# Altium PCB CORE_FPGA.PcbDoc (part 2 of 3)
Units mil, origin at the board's own origin, x right, y up, seen from the top; angles counter-clockwise.
Board outline 2362.21 x 2755.91 mil, 6 copper layers (TOP, GND, PWR1, PWR2, 3.3V, BOTTOM), stack 58.111 mil thick; 162 components, 160 nets, 858 pads, 377 vias.
Unrouted connection lines stored in the file: 4.
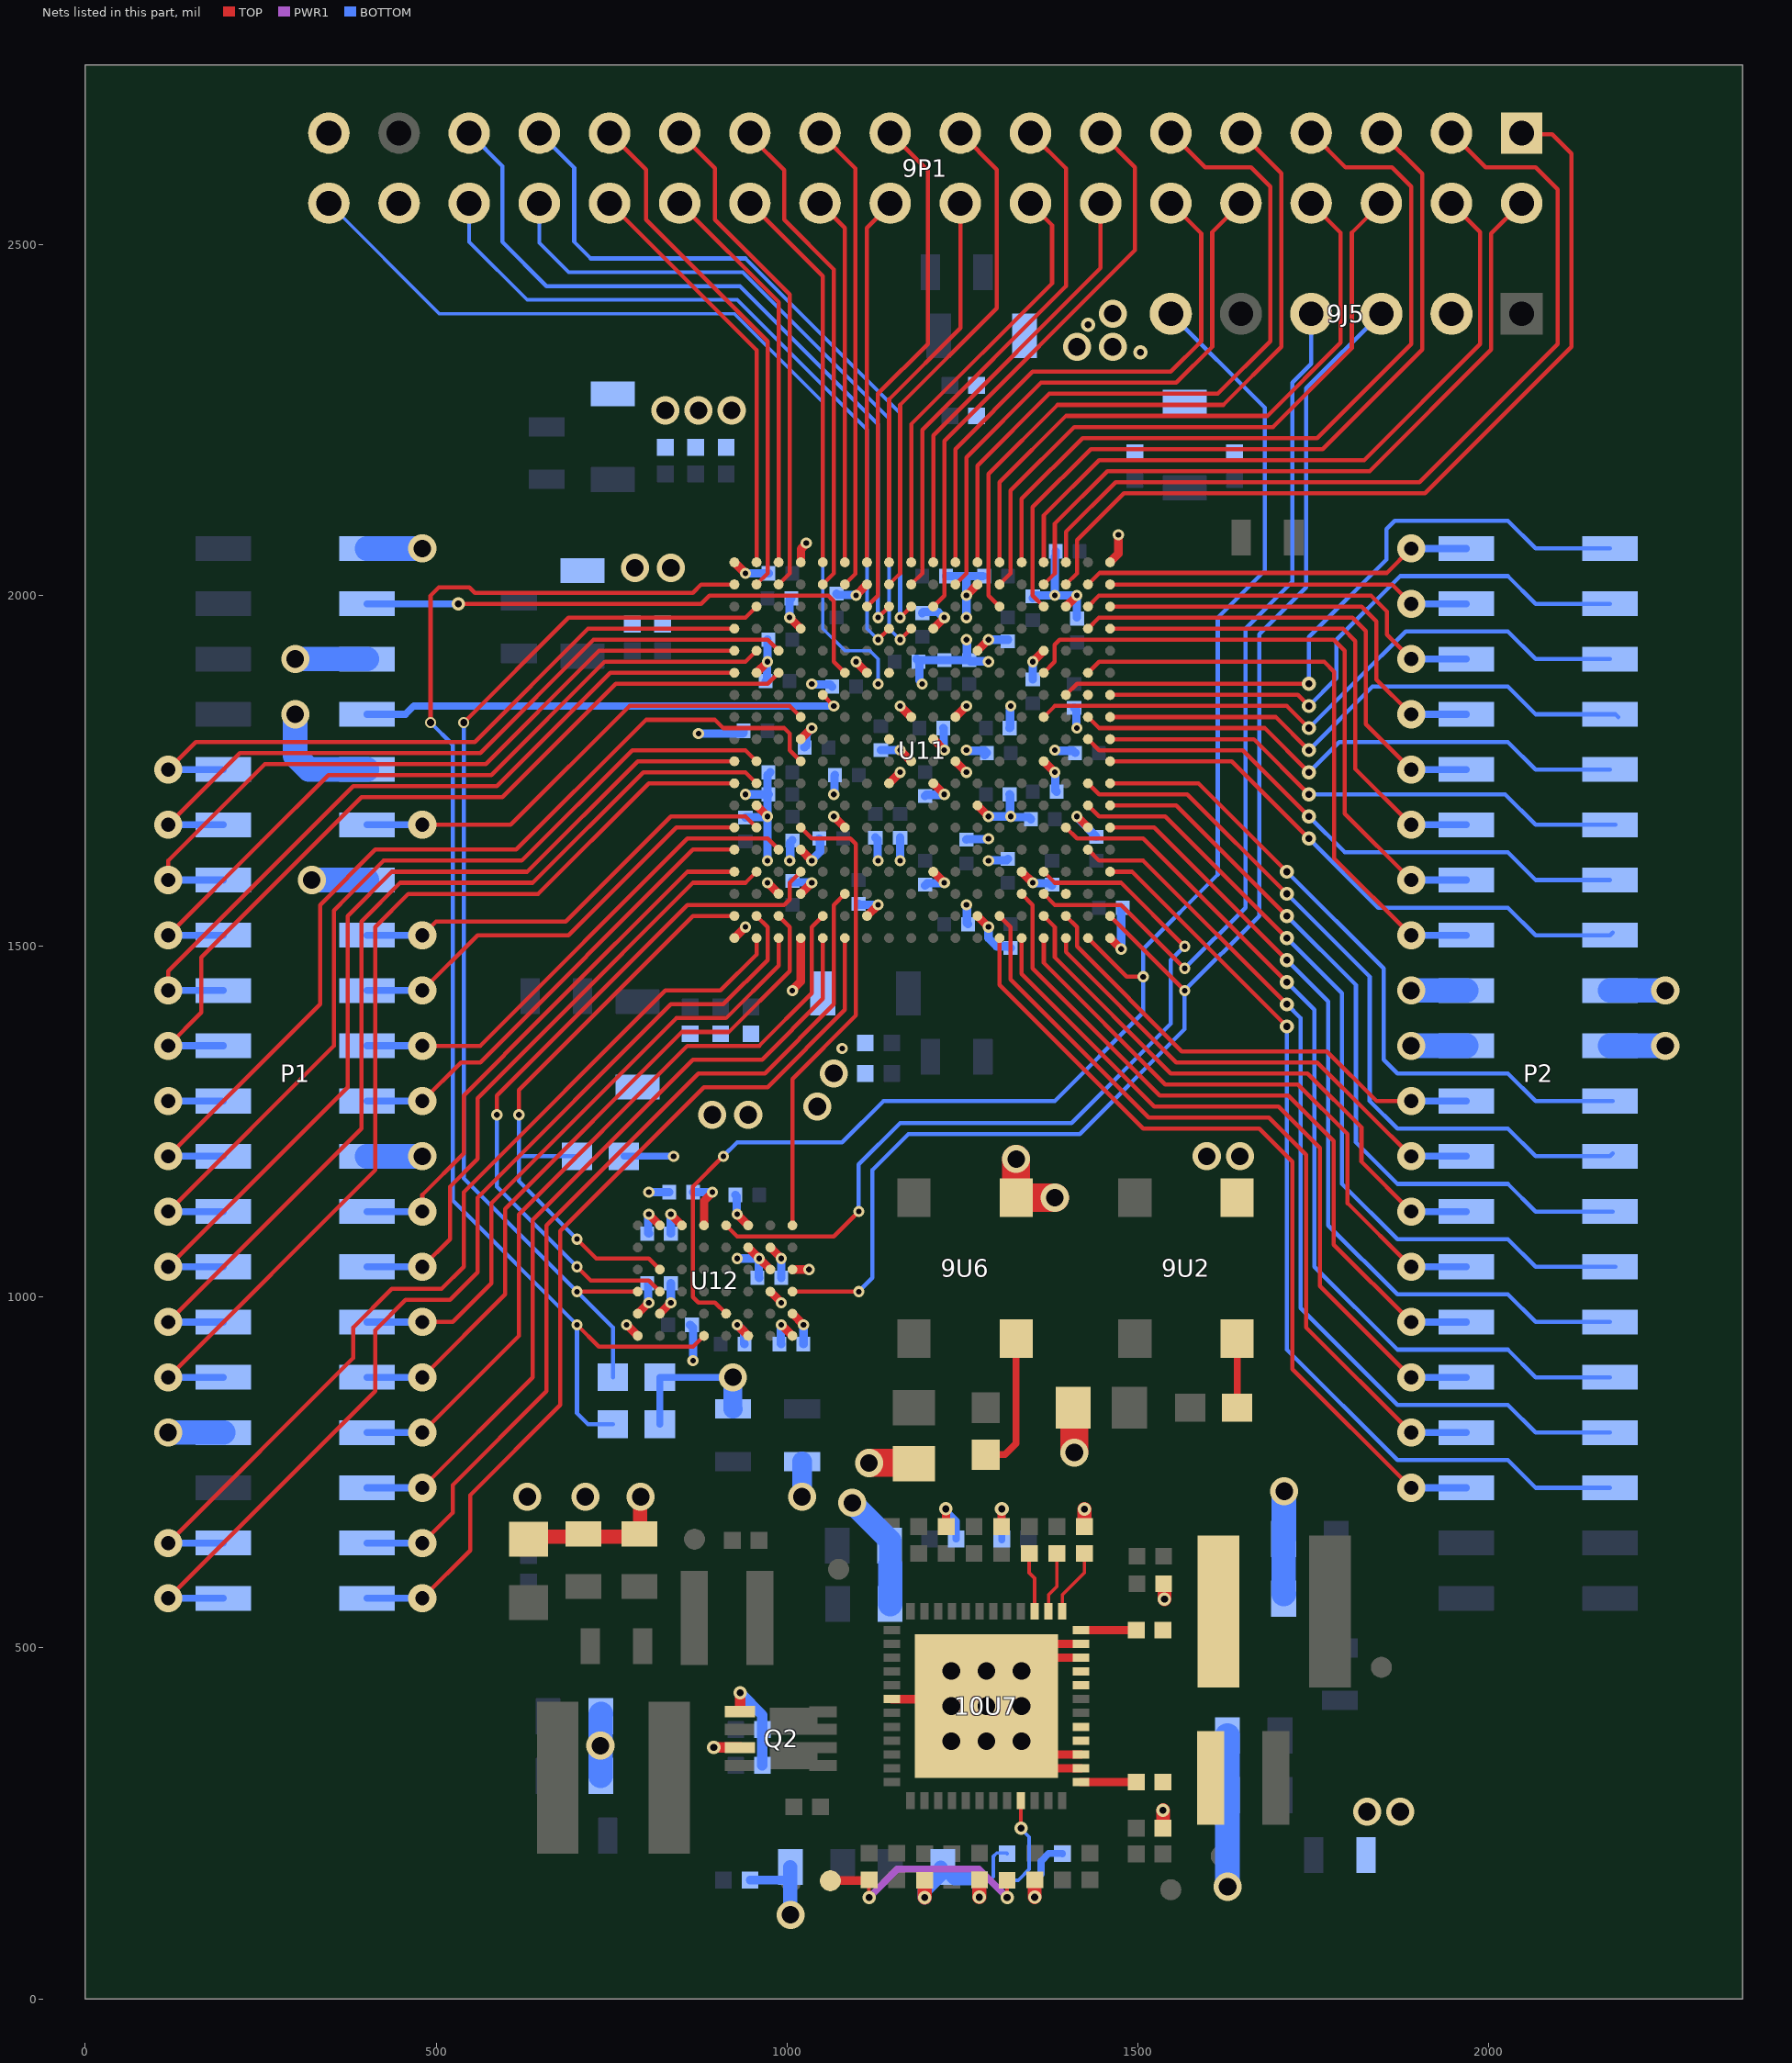
[diagram p6: the nets of this part, all layers, seen from the top]

## Via types
v1: diameter 16, hole 8, TOP to BOTTOM, 150 vias
v2: diameter 40, hole 25, TOP to BOTTOM, 114 vias
v3: diameter 19, hole 10, TOP to BOTTOM, 44 vias
v4: diameter 40, hole 20, TOP to BOTTOM, 44 vias
v5: diameter 20, hole 10, TOP to BOTTOM, 23 vias
v6: diameter 16, hole 10, TOP to BOTTOM, 2 vias

## Nets (pads, with @x,y where several pads share a name; then routed paths per layer and width w, separated by ;. In a path a pad name is that pad's centre, name@x,y a point inside that pad or via, vN(x,y) a via of type N, cw(c..) or ccw(c..) an arc to the next point about the centre after c; other vN are vias at no path point) (continued)
CFPGA_VREG: 10U7.45 C1015.1 R1117.1 R1137.1 TP11.1 | length 500.1
  TOP w5: v3(1117.06,144.65) R1117.1@1117.06,168.95 ; v3(1313.91,144.65) R1137.1@1313.91,168.95 ; v3(1333.59,243.07) 10U7.45@1333.59,282.44
  TOP w12: TP11.1@1061.94,168.27 1062.29,168.62 1116.7,168.62 R1117.1@1117.05,168.97
  PWR1 w10: v3(1117.06,144.65) 1157.45,185.04 1273.52,185.04 1312.89,145.67 v3@1314.96,145.67
  BOTTOM w5: v3(1313.91,144.65) 1313.91,168.95 1329.93,168.95 1345.41,184.43 1345.41,230.84 1333.59,242.65 v3(1333.59,243.07)
CPU_CLK: P1.13 U11.V5 | length 1037.3
  TOP w6: v4(118.11,1594.49) 118.11,1622.05 255.91,1759.84 570.87,1759.84 720.47,1909.45 732.28,1921.26 U11.V5@925.2,1921.26
  BOTTOM w10: v4(118.11,1594.49) P1.13@196.85,1594.49
CPU_CS: P1.15 U11.U5 | length 1085.3
  TOP w6: v4(118.11,1515.75) 251.97,1649.61 346.46,1744.09 578.74,1744.09 740.16,1905.51 870.08,1905.51 940.94,1905.51 U11.U5@956.69,1921.26
  BOTTOM w10: v4(118.11,1515.75) P1.15@196.85,1515.75
CPU_I2S_DI1: 9P1.4 U11.D1 | length 1011.1
  TOP w6: U11.D1@1366.14,2047.24 1366.14,2114.17 1444.88,2192.91 1822.83,2192.91 1988.19,2358.27 1988.19,2518.11 1948.82,2557.48 9P1.4@1948.82,2562.99
CPU_I2S_DI2: 9P1.8 U11.F1 | length 907.7
  TOP w6: U11.F1@1303.15,2047.24 1303.15,2161.42 1397.64,2255.91 1685.04,2255.91 1789.37,2360.24 1789.37,2516.93 9P1.8@1747.24,2559.06 1743.31,2562.99 9P1.8@1740.16,2562.99
CPU_I2S_DI3: 9P1.12 U11.H1 | length 795.8
  TOP w6: U11.H1@1240.16,2047.24 1240.16,2208.66 1350.39,2318.9 1547.24,2318.9 1590.55,2362.2 1590.55,2515.75 9P1.12@1547.24,2559.06 9P1.12@1543.31,2562.99
CPU_I2S_DI4: 9P1.16 U11.K1 | length 602.5
  TOP w6: U11.K1@1177.17,2047.24 1177.17,2244.09 1377.95,2444.88 1377.95,2527.56 9P1.16@1350.39,2555.12
CPU_I2S_DI5: 9P1.20 U11.M1 | length 531.7
  TOP w6: U11.M1@1114.17,2047.24 1114.17,2523.62 1147.24,2556.69 1147.24,2557.48 9P1.20@1141.73,2562.99
CPU_I2S_DI6: 9P1.24 U11.P1 | length 559.8
  TOP w6: 9P1.24@944.88,2562.99 944.88,2561.42 9P1.24@947.24,2559.06 1051.18,2455.12 U11.P1@1051.18,2047.24
CPU_I2S_DI7: 9P1.28 U11.U1 | length 605.7
  TOP w6: 9P1.28@740.16,2559.06 9P1.28@747.24,2559.06 956.69,2349.61 U11.U1@956.69,2047.24
CPU_I2S_DI8: 9P1.32 U11.L4 | length 1058.6
  TOP w6: v1(1129.92,1937.01) U11.L4@1145.67,1952.76
  BOTTOM w5: 9P1.32@543.31,2555.12 547.24,2551.18 547.24,2503.94 629.92,2421.26 929.13,2421.26 1114.17,2236.22 1114.17,1952.76 v1(1129.92,1937.01)
CPU_I2S_DO1: 9P1.2 U11.D2 | length 1044.5
  TOP w6: U11.D2@1366.14,2015.75 1381.89,2031.5 1381.89,2102.36 1456.69,2177.17 1830.71,2177.17 2003.94,2350.39 2003.94,2515.75 9P1.2@2047.24,2559.06
CPU_I2S_DO2: 9P1.6 U11.F2 | length 943.4
  TOP w6: U11.F2@1303.15,2015.75 1318.9,2031.5 1318.9,2149.61 1409.45,2240.16 1692.91,2240.16 1805.12,2352.36 1805.12,2516.93 9P1.6@1847.24,2559.06 1851.18,2562.99 9P1.6@1854.33,2562.99
CPU_I2S_DO3: 9P1.10 U11.H2 | length 829.8
  TOP w6: U11.H2@1240.16,2015.75 1255.91,2031.5 1255.91,2196.85 1362.2,2303.15 1555.12,2303.15 1606.3,2354.33 1606.3,2518.11 9P1.10@1647.24,2559.06 1649.61,2561.42 9P1.10@1649.61,2562.99
CPU_I2S_DO4: 9P1.14 U11.J1 | length 611.3
  TOP w6: U11.J1@1208.66,2047.24 1208.66,2228.35 1447.24,2466.93 1447.24,2557.48 9P1.14@1448.82,2559.06
CPU_I2S_DO5: 9P1.18 U11.L1 | length 558.1
  TOP w6: U11.L1@1145.67,2047.24 1145.67,2279.53 1247.24,2381.1 9P1.18@1247.24,2559.06 1247.24,2562.2 9P1.18@1248.03,2562.99
CPU_I2S_DO6: 9P1.22 U11.N1 | length 526.5
  TOP w6: 9P1.22@1047.24,2559.06 1082.68,2523.62 U11.N1@1082.68,2047.24
CPU_I2S_DO7: 9P1.26 U11.T1 | length 571
  TOP w6: 9P1.26@846.46,2559.06 9P1.26@847.24,2559.06 988.19,2418.11 U11.T1@988.19,2047.24
CPU_I2S_DO8: 9P1.30 U11.K4 | length 1011.4
  TOP w6: v1(1161.42,1937.01) U11.K4@1177.17,1952.76
  BOTTOM w5: 9P1.30@649.61,2566.93 647.24,2564.57 9P1.30@647.24,2559.06 647.24,2502.36 688.98,2460.63 937.01,2460.63 1145.67,2251.97 1145.67,1952.76 v1(1161.42,1937.01)
CPU_I2S_FRM1: 9P1.3 U11.C1 | length 1261.6
  TOP w6: U11.C1@1397.64,2047.24 1397.64,2090.55 1468.5,2161.42 1901.57,2161.42 2098.43,2358.27 2098.43,2578.74 2066.93,2610.24 1996.06,2610.24 1948.82,2657.48 9P1.3@1948.82,2661.42
CPU_I2S_FRM2: 9P1.7 U11.E1 | length 1139.7
  TOP w6: U11.E1@1334.65,2047.24 1334.65,2137.8 1421.26,2224.41 1755.91,2224.41 1889.76,2358.27 1889.76,2582.68 1862.2,2610.24 1796.06,2610.24 9P1.7@1747.24,2659.06 1744.88,2661.42 9P1.7@1744.09,2661.42
CPU_I2S_FRM3: 9P1.11 U11.G1 | length 1029.6
  TOP w6: U11.G1@1271.65,2047.24 1271.65,2185.04 1374.02,2287.4 1614.17,2287.4 1688.98,2362.2 1688.98,2582.68 1661.42,2610.24 1596.06,2610.24 1548.82,2657.48 9P1.11@1539.37,2657.48
CPU_I2S_FRM4: 9P1.15 U11.K2 | length 756.6
  TOP w6: U11.K2@1177.17,2015.75 1192.91,2031.5 1192.91,2236.22 1397.64,2440.94 1397.64,2608.66 1350.39,2655.91 9P1.15@1350.39,2661.42
CPU_I2S_FRM5: 9P1.19 U11.M3 | length 735.9
  TOP w6: U11.M3@1114.17,1984.25 1129.92,2000 1129.92,2287.4 1200.79,2358.27 1200.79,2605.51 9P1.19@1147.24,2659.06 1145.67,2660.63 9P1.19@1145.67,2661.42
CPU_I2S_FRM6: 9P1.23 U11.P2 | length 701.1
  TOP w6: 9P1.23@948.82,2661.42 948.82,2653.54 996.06,2606.3 996.06,2535.43 1066.93,2464.57 1066.93,2031.5 U11.P2@1051.18,2015.75
CPU_I2S_FRM7: 9P1.27 U11.U2 | length 741.7
  TOP w6: 9P1.27@748.03,2657.48 748.82,2657.48 799.21,2607.09 799.21,2535.43 972.44,2362.2 972.44,2031.5 U11.U2@956.69,2015.75
CPU_I2S_FRM8: 9P1.31 U11.L3 | length 1127.5
  TOP w6: v1(1129.92,1968.5) U11.L3@1145.67,1984.25
  BOTTOM w6: 9P1.31@543.31,2669.29 543.31,2662.99 9P1.31@547.24,2659.06 594.49,2611.81 594.49,2503.94 657.48,2440.94 933.07,2440.94 1129.92,2244.09 v1(1129.92,1968.5)
CPU_I2S_MCLK: 9P1.36 U11.L6 | length 1276.3
  BOTTOM w5: 9P1.36@347.24,2559.06 504.72,2401.57 925.2,2401.57 1051.18,2275.59 1051.18,1952.76 1082.68,1921.26 1118.11,1921.26 1129.92,1909.45 v1(1129.92,1874.02)
CPU_I2S_SCLK1: 9P1.1 U11.C2 | length 1251.8
  TOP w6: U11.C2@1397.64,2015.75 1413.39,2031.5 1413.39,2078.74 1480.31,2145.67 1909.45,2145.67 2118.11,2354.33 2118.11,2629.92 2090.55,2657.48 2048.82,2657.48 9P1.1@2047.24,2659.06 2044.88,2661.42 9P1.1@2043.31,2661.42
CPU_I2S_SCLK2: 9P1.5 U11.D3 | length 1129.3
  TOP w6: U11.D3@1366.14,1984.25 1350.39,2000 1350.39,2125.98 1433.07,2208.66 1763.78,2208.66 1905.51,2350.39 1905.51,2600.79 1848.82,2657.48 9P1.5@1846.46,2657.48
CPU_I2S_SCLK3: 9P1.9 U11.F3 | length 1017.8
  TOP w6: U11.F3@1303.15,1984.25 1287.4,2000 1287.4,2173.23 1385.83,2271.65 1622.05,2271.65 1704.72,2354.33 1704.72,2601.57 1649.61,2656.69 9P1.9@1649.61,2661.42
CPU_I2S_SCLK4: 9P1.13 U11.J3 | length 825.3
  TOP w6: U11.J3@1208.66,1984.25 1224.41,2000 1224.41,2220.47 1496.06,2492.13 1496.06,2610.24 9P1.13@1447.24,2659.06 1444.88,2661.42 9P1.13@1444.88,2669.29
CPU_I2S_SCLK5: 9P1.17 U11.L2 | length 732.6
  TOP w6: U11.L2@1145.67,2015.75 1161.42,2031.5 1161.42,2271.65 1299.21,2409.45 1299.21,2607.09 9P1.17@1247.24,2659.06 1244.88,2661.42 9P1.17@1244.09,2661.42
CPU_I2S_SCLK6: 9P1.21 U11.N2 | length 679.3
  TOP w6: 9P1.21@1039.37,2661.42 1044.88,2661.42 9P1.21@1047.24,2659.06 1097.76,2608.54 1097.76,2030.83 U11.N2@1082.68,2015.75
CPU_I2S_SCLK7: 9P1.25 U11.T2 | length 715.8
  TOP w6: 9P1.25@850.39,2661.42 850.39,2655.91 897.64,2608.66 897.64,2535.43 1003.94,2429.13 1003.94,2031.5 U11.T2@988.19,2015.75
CPU_I2S_SCLK8: 9P1.29 U11.K3 | length 1058
  TOP w6: v1(1161.42,1968.5) U11.K3@1177.17,1984.25
  BOTTOM w6: 9P1.29@645.67,2661.42 645.67,2660.63 9P1.29@647.24,2659.06 696.85,2609.45 696.85,2503.94 720.47,2480.32 940.94,2480.32 1161.42,2259.84 v1(1161.42,1968.5)
CPU_MISO: P1.9 U11.V4 | length 969
  TOP w6: v4(118.11,1751.97) 157.48,1791.34 555.12,1791.34 716.54,1952.76 U11.V4@925.2,1952.76
  BOTTOM w10: v4(118.11,1751.97) P1.9@196.85,1751.97
CPU_MOSI: P1.11 U11.T5 | length 1064.6
  TOP w6: v4(118.11,1673.23) 220.47,1775.59 562.99,1775.59 724.41,1937.01 972.44,1937.01 U11.T5@988.19,1921.26
  BOTTOM w10: v4(118.11,1673.23) P1.11@196.85,1673.23
CPU_SCL: P1.17 U11.V6 | length 1089.5
  TOP w6: v4(118.11,1437.01) 118.11,1464.57 381.89,1728.35 586.61,1728.35 748.03,1889.76 U11.V6@925.2,1889.76
  BOTTOM w10: v4(118.11,1437.01) P1.17@196.85,1437.01
CPU_SDA: P1.19 U11.T6 | length 1215.1
  TOP w6: v4(118.11,1358.27) 165.35,1405.51 165.35,1484.25 393.7,1712.6 594.49,1712.6 755.91,1874.02 866.14,1874.02 972.44,1874.02 U11.T6@988.19,1889.76
  BOTTOM w10: v4(118.11,1358.27) P1.19@196.85,1358.27
CPU_TDM_CODEC_INTn: P1.31 U11.V11 | length 1439.4
  TOP w6: v4(118.11,885.83) 413.39,1181.1 413.39,1527.56 460.63,1574.8 645.67,1574.8 795.28,1724.41 803.15,1732.28 U11.V11@925.2,1732.28
  BOTTOM w10: v4(118.11,885.83) P1.31@196.85,885.83
CPU_TDM_SPI_CLK: P1.23 U11.R10 | length 1358.6
  TOP w6: v4(118.11,1200.79) 334.65,1417.32 334.65,1559.06 413.39,1637.8 614.17,1637.8 783.46,1807.09 799.21,1822.83 897.64,1822.83 909.45,1811.02 991.46,1811.02 ; 992.13,1811.02 996.06,1811.02 1003.94,1803.15 1003.94,1779.53 U11.R10@1019.69,1763.78
  BOTTOM w10: v4(118.11,1200.79) P1.23@196.85,1200.79
CPU_TDM_SPI_CS0: P1.29 U11.U11 | length 1421.3
  TOP w6: v4(118.11,964.57) 393.7,1240.16 393.7,1535.43 448.82,1590.55 637.8,1590.55 795.28,1748.03 940.94,1748.03 U11.U11@956.69,1732.28
  BOTTOM w10: v4(118.11,964.57) P1.29@196.85,964.57
CPU_TDM_SPI_MISO: P1.27 U11.V10 | length 1327.2
  TOP w6: v4(118.11,1043.31) 374.02,1299.21 374.02,1543.31 437.01,1606.3 629.92,1606.3 787.4,1763.78 U11.V10@925.2,1763.78
  BOTTOM w10: v4(118.11,1043.31) P1.27@196.85,1043.31
CPU_TDM_SPI_MOSI: P1.25 U11.U10 | length 1309.2
  TOP w6: v4(118.11,1122.05) 354.33,1358.27 354.33,1551.18 374.11,1570.96 425.2,1622.05 622.05,1622.05 779.53,1779.53 940.94,1779.53 U11.U10@956.69,1763.78
  BOTTOM w10: v4(118.11,1122.05) P1.25@196.85,1122.05
f2MHz: P1.12 U11.R8 | length 694.8
  TOP w6: v4(480.31,1673.23) 606.3,1673.23 775.59,1842.52 1003.94,1842.52 U11.R8@1019.69,1826.77
  BOTTOM w10: P1.12@401.57,1673.23 v4(480.31,1673.23)
"FLASH 3.3V": 9C9.2 9C10.2 9C11.2 9C14.2 9C15.2 9L2.2 9R15.2 9R16.2 9R17.2 U12.B2 U12.C6 U12.D6 U12.G5 U12.H2 | length 566.4
  TOP w12: U12.B2@818.9,976.38 v1(834.65,992.13) ; v1(834.65,1118.11) U12.C6@850.39,1102.36 ; U12.D6@881.89,1102.36 881.89,1136.71 893.7,1148.52 v1(893.7,1149.61) ; U12.G5@976.38,1070.87 v1(992.13,1055.12) ; U12.H2@1007.87,976.38 v1(1023.62,960.63)
  BOTTOM w10: 9R15.2@767.72,1200.79 v1(838.58,1200.79) ; 9R16.2@818.9,818.9 9R17.2@818.9,885.83 v2(923.16,885.83)
  BOTTOM w12: v1(834.65,992.13) 9C11.2@834.65,1019.68 ; 9C15.2@834.65,1090.55 v1(834.65,1118.11) ; 9C9.2@866.14,1149.61 v1(893.7,1149.61) ; 9C10.2@992.13,1027.56 v1(992.13,1055.12) ; 9C14.2@1023.62,933.07 v1(1023.62,960.63)
  BOTTOM w27: v2(923.16,885.83) 923.16,840.62 9L2.2@923.23,840.55
FLASH_1.8V: 9L1.2 L223.2 | length 50.2
  BOTTOM w28: v2(1021.65,715.57) 9L1.2@1021.65,765.75
  other v2: 1826.95,266.75 1874.19,266.75
FPGA-CCLK: U11.R15 U12.B3 | length 1003.2
  TOP w6: v1(586.61,1259.84) 586.61,1287.4 858.27,1559.06 996.06,1559.06 1003.94,1566.93 1003.94,1590.55 U11.R15@1019.69,1606.3 ; v1(700.79,1043.31) 720.47,1023.62 803.15,1023.62 U12.B3@818.9,1007.87
  BOTTOM w6: v1(586.61,1259.84) 586.61,1157.48 v1(700.79,1043.31)
FPGA-DIN: U11.R13 U12.H6 | length 669.3
  TOP w6: U12.H6@1007.87,1102.36 1007.87,1311.02 1098.43,1401.57 1098.43,1645.67 1090.55,1653.54 1035.43,1653.54 U11.R13@1019.69,1669.29
FPGA-INIT_B: 9R17.1 U11.U3 U12.A3 | length 1593.8
  TOP w6: v6(539.37,1818.9) 688.98,1968.5 940.94,1968.5 U11.U3@956.69,1984.25 ; v1(700.79,1007.87) 701.04,1008.13 787.15,1008.13 U12.A3@787.4,1007.87
  BOTTOM w6: v6(539.37,1818.9) 539.37,1169.29 v1(700.79,1007.87) 751.97,956.69 9R17.1@751.97,885.83
FPGA_PDN1: P2.35 U11.F18 | length 1202.1
  TOP w6: U11.F18@1303.15,1511.81 1303.15,1444.88 1507.87,1240.16 1673.23,1240.16 1720.47,1192.91 1720.47,897.64 v4(1889.76,728.35)
  BOTTOM w10: v4(1889.76,728.35) P2.35@1968.5,728.35
FPGA_PDN2: P2.33 U11.F17 | length 1158.3
  TOP w6: U11.F17@1303.15,1543.31 1318.9,1527.56 1318.9,1452.76 1515.75,1255.91 1687.01,1255.91 1740.16,1202.76 1740.16,956.69 v4(1889.76,807.09)
  BOTTOM w10: v4(1889.76,807.09) P2.33@1968.5,807.09
FPGA_PDN3: P2.31 U11.E18 | length 1038.4
  TOP w6: U11.E18@1334.65,1511.81 1334.65,1460.63 1523.62,1271.65 1700.79,1271.65 1759.84,1212.6 1759.84,1015.75 v4(1889.76,885.83)
  BOTTOM w10: v4(1889.76,885.83) P2.31@1968.5,885.83
FPGA_PDN4: P2.29 U11.E16 | length 1026.2
  TOP w6: U11.E16@1334.65,1574.8 1350.39,1559.06 1350.39,1468.5 1531.5,1287.4 1714.57,1287.4 1779.53,1222.44 1779.53,1074.8 v4(1889.76,964.57)
  BOTTOM w10: v4(1889.76,964.57) P2.29@1968.5,964.57
FPGA_PDN5: P2.27 U11.D18 | length 874.8
  TOP w6: U11.D18@1366.14,1511.81 1366.14,1476.38 1539.37,1303.15 1728.35,1303.15 1799.21,1232.28 1799.21,1133.86 v4(1889.76,1043.31)
  BOTTOM w10: v4(1889.76,1043.31) P2.27@1968.5,1043.31
FPGA_PDN6: P2.25 U11.D17 | length 831.1
  TOP w6: U11.D17@1366.14,1543.31 1381.89,1527.56 1381.89,1484.25 1547.24,1318.9 1742.13,1318.9 1818.9,1242.13 1818.9,1192.91 v4(1889.76,1122.05)
  BOTTOM w10: v4(1889.76,1122.05) P2.25@1968.5,1122.05
FPGA_PDN7: P2.23 U11.C18 | length 711.2
  TOP w6: U11.C18@1397.64,1511.81 1397.64,1492.13 1555.12,1334.65 1755.91,1334.65 1830.71,1259.84 v4(1889.76,1200.79)
  BOTTOM w10: v4(1889.76,1200.79) P2.23@1968.5,1200.79
FPGA_PDN8: P2.21 U11.C17 | length 696.3
  TOP w6: U11.C17@1397.64,1543.31 1413.39,1527.56 1413.39,1500 1562.99,1350.39 1769.68,1350.39 1840.55,1279.53 v4(1889.76,1279.53)
  BOTTOM w10: v4(1889.76,1279.53) P2.21@1968.5,1279.53
FPGA_PROG_B_2: 9R16.1 U11.V2 U12.D1 | length 1956.1
  TOP w6: v6(492.13,1818.9) 492.13,2000 503.94,2011.81 547.24,2011.81 555.12,2003.94 866.14,2003.94 877.95,2015.75 U11.V2@925.2,2015.75 ; v1(700.79,960.63) 732.03,929.39 866.39,929.39 U12.D1@881.89,944.88
  BOTTOM w6: v6(492.13,1818.9) 523.62,1787.4 523.62,1137.8 v1(700.79,960.63) 700.79,834.65 716.54,818.9 9R16.1@751.97,818.9
FPGA_TCK: 9J5.3 U11.A17 U12.H3 | length 2089.7
  TOP w6: U12.H3@1007.87,1007.87 v1(1102.36,1007.87) ; U11.A17@1460.63,1543.31 v1(1566.93,1437.01)
  BOTTOM w6: v1(1102.36,1007.87) 1122.05,1027.56 1122.05,1181.1 1173.23,1232.28 1417.32,1232.28 1566.93,1381.89 v1(1566.93,1437.01) 1673.23,1543.31 1673.23,1944.88 1740.16,2011.81 1740.16,2295.28 9J5.3@1846.46,2401.57
FPGA_TDI: U11.D15 U12.E6 | length 1168.4
  TOP w6: U12.E6@913.39,1102.36 929.13,1086.61 1066.93,1086.61 v1(1102.36,1122.05) ; U11.D15@1366.14,1606.3 1381.89,1590.55 1476.38,1590.55 v1(1566.93,1500)
  BOTTOM w6: v1(1102.36,1122.05) 1102.36,1188.98 1161.42,1248.03 1405.51,1248.03 1547.24,1389.76 1547.24,1480.31 v1(1566.93,1500)
FPGA_TDO: 9J5.4 U11.D16 | length 1260.8
  TOP w6: U11.D16@1366.14,1574.8 1381.89,1559.06 1476.38,1559.06 1541.34,1494.09 v1(1566.93,1468.5)
  BOTTOM w6: v1(1566.93,1468.5) 1653.54,1555.12 1653.54,1952.76 1720.47,2019.68 1720.47,2303.15 1747.24,2329.92 9J5.4@1747.24,2401.57 1747.24,2408.66 9J5.4@1748.03,2409.45
FPGA_TMS: 9J5.6 U11.B18 U12.E2 | length 2183.8
  TOP w6: v1(909.45,1200.79) 866.14,1157.48 866.14,1000 874.02,992.13 897.64,992.13 U12.E2@913.39,976.38 ; U11.B18@1429.13,1511.81 1484.25,1456.69 v1(1507.87,1456.69)
  BOTTOM w6: v1(909.45,1200.79) 929.13,1220.47 1078.74,1220.47 1137.8,1279.53 1381.89,1279.53 1507.87,1405.51 v1(1507.87,1456.69) 1507.87,1496.06 1614.17,1602.36 1614.17,1968.5 1681.1,2035.43 1681.1,2267.72 9J5.6@1547.24,2401.57
fR0: P2.16 U11.A10 | length 820.9
  TOP w6: U11.A10@1460.63,1763.78 1633.86,1763.78 v5(1744.09,1653.54)
  BOTTOM w6: v5(1744.09,1653.54) 1842.52,1555.12 2027.56,1555.12 2066.93,1515.75 P2.16@2173.23,1515.75 P2.16@2177.17,1519.68
fR1: P2.14 U11.B9 | length 827.3
  TOP w6: U11.B9@1429.13,1795.28 1444.88,1779.53 1649.61,1779.53 v5(1744.09,1685.04)
  BOTTOM w6: v5(1744.09,1685.04) 1795.28,1633.86 2027.56,1633.86 2066.93,1594.49 P2.14@2173.23,1594.49
fR2: P2.12 U11.A9 | length 771
  TOP w6: U11.A9@1460.63,1795.28 1665.35,1795.28 v5(1744.09,1716.54)
  BOTTOM w6: v5(1744.09,1716.54) 2023.62,1716.54 2066.93,1673.23 P2.12@2181.1,1673.23
fR3: P2.10 U11.B8 | length 811
  TOP w6: U11.B8@1429.13,1826.77 1444.88,1811.02 1681.1,1811.02 v5(1744.09,1748.03)
  BOTTOM w6: v5(1744.09,1748.03) 1787.4,1791.34 2027.56,1791.34 2066.93,1751.97 P2.10@2173.23,1751.97
fR4: P2.8 U11.A8 | length 799.4
  TOP w6: U11.A8@1460.63,1826.77 1696.85,1826.77 v5(1744.09,1779.53)
  BOTTOM w6: v5(1744.09,1779.53) 1834.65,1870.08 2027.56,1870.08 2066.93,1830.71 2181.1,1830.71 P2.8@2185.04,1826.77
fR5: P2.6 U11.D8 | length 904
  TOP w6: U11.D8@1366.14,1826.77 1381.89,1842.52 1712.6,1842.52 v5(1744.09,1811.02)
  BOTTOM w6: v5@1740.16,1811.02 v5(1744.09,1811.02) 1811.02,1877.95 1881.89,1948.82 2027.56,1948.82 2066.93,1909.45 P2.6@2173.23,1909.45
fR6: P2.4 U11.A7 | length 844.4
  TOP w6: U11.A7@1460.63,1858.27 1728.35,1858.27 v5(1744.09,1842.52)
  BOTTOM w6: v5(1744.09,1842.52) 1783.46,1881.89 1783.46,1937.01 1874.02,2027.56 2027.56,2027.56 2066.93,1988.19 P2.4@2173.23,1988.19
fR7: P2.2 U11.C7 | length 959.2
  TOP w6: U11.C7@1397.64,1858.27 1413.39,1874.02 v5(1744.09,1874.02)
  BOTTOM w6: v5(1744.09,1874.02) 1744.09,1940.94 1854.33,2051.18 1854.33,2094.49 1866.14,2106.3 2027.56,2106.3 2066.93,2066.93 P2.2@2173.23,2066.93
fRX: P1.8 U11.P7 | length 692.5
  TOP w6: U11.P7@1051.18,1858.27 v1(1066.93,1842.52)
  BOTTOM w10: P1.8@401.57,1830.71 456.69,1830.71 468.5,1842.52 v1(1066.93,1842.52)
fT0: P2.36 U11.A15 | length 1350
  TOP w6: U11.A15@1460.63,1606.3 1492.13,1606.3 v5(1712.6,1385.83)
  BOTTOM w6: v5@1712.6,1389.76 v5(1712.6,1385.83) 1712.6,925.2 1870.08,767.72 2027.56,767.72 2066.93,728.35 P2.36@2173.23,728.35
fT1: P2.34 U11.B14 | length 1330.3
  TOP w6: U11.B14@1429.13,1637.8 1444.88,1622.05 1507.87,1622.05 v5(1712.6,1417.32)
  BOTTOM w6: v5(1712.6,1417.32) 1732.28,1397.64 1732.28,984.25 1870.08,846.46 2027.56,846.46 2066.93,807.09 P2.34@2173.23,807.09
fT2: P2.32 U11.C13 | length 1314.6
  TOP w6: U11.C13@1397.64,1669.29 1413.39,1653.54 1507.87,1653.54 v5(1712.6,1448.82)
  BOTTOM w6: v5(1712.6,1448.82) 1751.97,1409.45 1751.97,1043.31 1870.08,925.2 2027.56,925.2 2066.93,885.83 P2.32@2173.23,885.83
fT3: P2.30 U11.A13 | length 1191.3
  TOP w6: U11.A13@1460.63,1669.29 1523.62,1669.29 v5(1712.6,1480.32)
  BOTTOM w6: v5(1712.6,1480.32) 1771.65,1421.26 1771.65,1102.36 1870.08,1003.94 2027.56,1003.94 2066.93,964.57 P2.30@2173.23,964.57
fT4: P2.28 U11.B12 | length 1183.4
  TOP w6: U11.B12@1429.13,1700.79 1444.88,1685.04 1539.37,1685.04 v5(1712.6,1511.81)
  BOTTOM w6: v5(1712.6,1511.81) 1791.34,1433.07 1791.34,1161.42 1870.08,1082.68 2027.56,1082.68 2066.93,1043.31 P2.28@2173.23,1043.31 P2.28@2181.1,1043.31
fT5: P2.26 U11.A12 | length 1087.7
  TOP w6: U11.A12@1460.63,1700.79 1555.12,1700.79 v5(1712.6,1543.31)
  BOTTOM w6: v5(1712.6,1543.31) 1811.02,1444.88 1811.02,1220.47 1870.08,1161.42 2027.56,1161.42 2066.93,1122.05 P2.26@2173.23,1122.05 P2.26@2177.17,1122.05
fT6: P2.24 U11.B11 | length 1073.6
  TOP w6: U11.B11@1429.13,1732.28 1444.88,1716.54 1570.87,1716.54 v5(1712.6,1574.8)
  BOTTOM w6: v5(1712.6,1574.8) 1830.71,1456.69 1830.71,1279.53 1870.08,1240.16 2027.56,1240.16 2066.93,1200.79 P2.24@2173.23,1200.79 P2.24@2177.17,1204.72
fT7: P2.22 U11.A11 | length 980.2
  TOP w6: U11.A11@1460.63,1732.28 1586.61,1732.28 v5(1712.6,1606.3)
  BOTTOM w6: v5(1712.6,1606.3) 1850.39,1468.5 1850.39,1338.58 1870.08,1318.9 2027.56,1318.9 2066.93,1279.53 P2.22@2177.17,1279.53
fTS0: P2.15 U11.B6 | length 863.1
  TOP w6: U11.B6@1429.13,1889.76 1444.88,1905.51 1765.93,1905.51 1780.2,1891.24 1780.2,1625.31 v4(1889.76,1515.75)
  BOTTOM w10: v4(1889.76,1515.75) P2.15@1968.5,1515.75
fTS1: P2.13 U11.D6 | length 914.1
  TOP w6: U11.D6@1366.14,1889.76 1381.73,1905.35 1381.73,1929.78 1388.96,1937.01 1779.45,1937.01 1795.2,1921.26 1795.2,1689.06 v4(1889.76,1594.49)
  BOTTOM w10: v4(1889.76,1594.49) P2.13@1968.5,1594.49
fTS2: P2.11 U11.A4 | length 730.3
  TOP w6: U11.A4@1460.63,1952.76 1792.68,1952.76 1810.2,1935.24 1810.2,1752.8 1889.2,1673.8 v4@1889.2,1673.24
  BOTTOM w10: v4(1889.76,1673.23) P2.11@1968.5,1673.23
fTS3: P2.9 U11.B4 | length 714.9
  TOP w6: U11.B4@1429.13,1952.76 1444.72,1968.34 1806.1,1968.34 1825.2,1949.24 1825.2,1816.54 v4(1889.76,1751.97) 1890.49,1751.24 v4@1891.2,1751.24
  BOTTOM w10: v4(1889.76,1751.97) P2.9@1968.5,1751.97
fTS4: P2.7 U11.A3 | length 620.5
  TOP w6: U11.A3@1460.63,1984.25 1819.19,1984.25 1840.2,1963.24 1840.2,1880.28 1887.2,1833.28 v4@1887.2,1829.24
  BOTTOM w10: v4(1889.76,1830.71) P2.7@1968.5,1830.71
fTS5: P2.5 U11.B3 | length 603.7
  TOP w6: U11.B3@1429.13,1984.25 1444.72,1999.84 1832.6,1999.84 1855.2,1977.24 1855.2,1944.02 1889.2,1910.02 v4@1889.2,1908.24
  BOTTOM w10: v4(1889.76,1909.45) P2.5@1968.5,1909.45
fTS6: P2.3 U11.A2 | length 519.3
  TOP w6: U11.A2@1460.63,2015.75 1862.2,2015.75 v4(1889.76,1988.19)
  BOTTOM w10: v4(1889.76,1988.19) P2.3@1968.5,1988.19
fTS7: P2.1 U11.B2 | length 560.6
  TOP w6: U11.B2@1429.13,2015.75 1445.54,2032.16 1854.99,2032.16 v4(1889.76,2066.93)
  BOTTOM w10: v4(1889.76,2066.93) P2.1@1968.5,2066.93
fTX: P1.4 U11.N6 | length 782.4
  TOP w6: v3(531.5,1988.19) 877.95,1988.19 889.76,2000 1059.06,2000 1066.93,1992.13 1066.93,1905.51 U11.N6@1082.68,1889.76
  BOTTOM w10: P1.4@401.57,1988.19 v3(531.5,1988.19)
GFPGA_DONE: 9R15.1 U11.V17 U12.B4 | length 879.3
  TOP w6: v1(618.11,1259.84) 618.11,1295.28 866.14,1543.31 U11.V17@925.2,1543.31 ; v1@696.85,1082.68 v1(700.79,1082.68) 728.35,1055.12 803.15,1055.12 U12.B4@818.9,1039.37
  BOTTOM w6: v1(618.11,1259.84) 618.11,1200.79 ; v1(700.79,1082.68) 618.11,1165.35 618.11,1200.79 ; 9R15.1@700.79,1200.79 618.11,1200.79
GND: 9C2.1 9C7.1 9C8.1 9C9.1 9C10.1 9C11.1 9C12.1 9C13.1 9C14.1 9C15.1 9J5.2 9P1.34 9P1.35 9U2.2 9U6.2 10C1.2 10C2.1 10C3.1 10C4.1 10C5.1 10C6.1 10C7.1 10C8.1 10C9.1 10C10.2 10C11.1 10C12.1 10C13.1 10C14.1 10C15.1 10C16.1 10C17.1 10C18.1 10C19.2 10C20.1 10C21.1 10C22.1 10C23.1 10C24.1 10C25.1 10C26.1 10C27.1 10C28.2 10C29.1 10C30.1 10C31.1 10C32.1 10C33.1 10C34.1 10C35.1 10C36.1 10C37.2 10C38.1 10C39.1 10C40.1 10C41.1 10C42.1 10C43.1 10C44.1 10C45.1 10C46.1 10C47.1 10C48.1 10C49.1 10C50.1 10C51.1 10C52.1 10C53.2 10C54.1 10C55.1 10C56.1 10C57.1 10C58.1 10C59.1 10C60.1 10C61.1 10C62.1 10C63.1 10C64.1 10C65.1 10C66.1 10C67.1 10U7.2 10U7.3 10U7.10 10U7.11 10U7.30 10U7.49 C1006.2 C1007.1 C1008.2 C1009.1 C1010.1 C1011.2 C1012.2 C1013.1 C1014.2 C1015.2 C1017.1 C1018.1 C1020.1 C1021.1 C1023.1 C1024.1 C1026.1 C1027.1 LED5.1 P1.2 P1.6 P1.10 P1.14 P1.21 P1.24 P1.33 P2.17 P2.18 P2.19 P2.20 Q2.S1 Q2.S2 R1123.1 R1127.1 R1128.2 R1129.1 R1131.2 R1133.1 R1135.1 R1136.2 R1144.2 R11118.1 U11.A1 U11.A18 U11.B7 U11.B13 U11.C3 U11.C16 U11.D5 U11.D10 U11.E15 U11.G2 U11.G5 U11.G12 U11.G17 U11.H8 U11.H10 U11.J4 U11.J9 U11.J11 U11.J15 U11.K8 U11.K10 U11.L9 U11.L11 U11.M2 U11.M6 U11.M17 U11.N13 U11.R1 U11.R4 U11.R9 U11.R14 U11.R16 U11.R18 U11.T16 U11.U6 U11.U12 U11.V1 U11.V18 U12.A1 U12.A2 U12.B6 U12.F1 U12.F5 U12.F6 U12.G3 U12.G4 U12.H1 U12.H4 | length 6376
  TOP w12: v1(771.65,960.63) U12.A1@787.4,944.88 ; U12.A2@787.4,976.38 v1(803.15,992.13) ; v1(803.15,1118.11) U12.B6@818.9,1102.36 ; U11.V18@925.2,1511.81 v1(940.94,1527.56) ; U11.V1@925.2,2047.24 v1(940.94,2031.5) ; v1(929.13,960.63) U12.F1@944.88,944.88 ; v1(929.13,1055.12) v1@930.22,1055.12 ; v1(929.13,1118.11) U12.F6@944.88,1102.36 ; U12.F5@944.88,1070.87 v1(960.63,1055.12) U12.G4@976.38,1039.37 ; U11.U12@956.69,1700.79 v1(972.44,1685.04) ; U11.U6@956.69,1889.76 v1(972.44,1905.51) ; v1(972.44,1590.55) U11.T16@988.19,1574.8 ; U12.G3@976.38,1007.87 v1(992.13,992.13) ; v1(992.13,960.63) U12.H1@1007.87,944.88 ; v1(1003.94,1968.5) U11.R4@1019.69,1952.76 ; U12.H4@1007.87,1039.37 v1(1031.5,1039.37) ; v1(1007.87,1437.01) 1007.87,1438.09 1019.69,1449.9 U11.R18@1019.69,1511.81 ; U11.R16@1019.69,1574.8 v1(1035.43,1590.55) ; U11.R14@1019.69,1637.8 v1(1035.43,1622.05) ; U11.R9@1019.69,1795.28 v1(1035.43,1811.02) ; U11.R1@1019.69,2047.24 1020.1,2047.66 1020.1,2066.26 1027.56,2073.72 v1(1027.56,2074.8) ; v1(1066.93,1685.04) U11.N13@1082.68,1669.29 ; v1(1098.43,1905.51) U11.M6@1114.17,1889.76 ; v1(1098.43,2000) U11.M2@1114.17,2015.75 ; U11.M17@1114.17,1543.31 v1(1129.92,1559.06) ; U11.L11@1145.67,1732.28 v1(1161.42,1748.03) ; 10U7.30@1149.54,427.13 10U7.49@1190.88,427.13 ; v1(1161.42,1779.53) U11.K10@1177.17,1763.78 ; v1(1161.42,1842.52) U11.K8@1177.17,1826.77 ; U11.J15@1208.66,1606.3 v1(1224.41,1590.55) ; U11.J11@1208.66,1732.28 v1(1224.41,1716.54) ; U11.J9@1208.66,1795.28 v1(1224.41,1779.53) ; U11.J4@1208.66,1952.76 v1(1224.41,1968.5) ; v3(1226.31,698.25) 1226.8,697.76 1226.8,671.76 R1131.2@1227.31,671.25 ; U11.H10@1240.16,1763.78 v1(1255.91,1748.03) ; U11.H8@1240.16,1826.77 v1(1255.91,1842.52) ; v1(1255.91,2000) U11.G2@1271.65,2015.75 ; U11.G17@1271.65,1543.31 v1(1287.4,1527.56) ; U11.G12@1271.65,1700.79 v1(1287.4,1685.04) ; U11.G5@1271.65,1921.26 v1(1287.4,1937.01) ; v5@1305.31,698.25 1306.17,697.39 1306.17,672.94 R11118.1@1306.03,672.8 ; U11.E15@1334.65,1606.3 v1(1350.39,1590.55) ; v1(1350.39,1905.51) U11.D5@1366.14,1921.26 ; U11.D10@1366.14,1763.78 v1(1381.89,1748.03) ; 10U7.49@1371.98,328.7 10U7.2@1419.22,328.7 ; 10U7.49@1371.98,348.39 10U7.3@1419.22,348.39 ; 10U7.49@1371.98,486.18 10U7.10@1419.22,486.18 ; 10U7.49@1371.98,505.87 10U7.11@1419.22,505.87 ; U11.C3@1397.64,1984.25 v1(1413.39,2000) ; v1(1413.39,1685.04) U11.B13@1429.13,1669.29 ; U11.A18@1460.63,1511.81 v1(1476.38,1496.06) ; U11.A1@1460.63,2047.24 1460.63,2047.83 1472.44,2059.64 v1(1472.44,2086.61)
  TOP w15: v3(895.8,358.15) Q2.S2@933.28,358.15 ; Q2.S1@933.28,409.33 v3(933.24,436.04)
  TOP w20: LED5.1@623.93,662.27 627.44,658.76 785.94,658.76 C1020.1@789.78,662.6 790.64,663.47 790.64,707.98 v2@790.93,708.27 ; v3(1196.47,144.48) R1127.1@1196.47,168.97 ; v3(1274.17,144.78) 1274.17,169.27 R1136.2@1274.54,169.64 ; v3(1353.17,144.78) 1353.17,169.53 R1144.2@1353.28,169.64 ; R1123.1@1424.15,672.8 v3(1424.17,697.78) ; R1133.1@1535.96,243.07 1536.17,243.27 v3(1536.17,268.78) ; R1135.1@1536.95,591.5 1538.17,590.28 v3(1538.17,569.78)
  TOP w40: v2@1118.11,763.78 9C12.1@1179.84,763.78 ; 9U6.2@1326.77,1142.99 v2(1326.77,1196.85) ; 9U6.2@1328.03,1141.73 v2(1381.89,1141.73) ; 9C2.1@1408.19,842.52 1409.45,841.26 v2@1409.45,779.53
  BOTTOM w5: C1014.2@1274.54,169.64 1274.68,169.78 1290.17,169.78 1294.17,173.78 1294.17,202.78 1299.17,207.78 1313.08,207.78 C1015.2@1313.9,206.97
  BOTTOM w10: v4(118.11,1279.53) P1.21@196.85,1279.53 ; C1006.2@1005.27,169.29 C1006.2@1008.31,166.25 ; v3(1226.31,698.25) 1226.31,695.82 1241.31,680.82 C1009.1@1241.31,655.25 ; C1013.1@1306.31,654.25 C1013.1@1306.31,655.25 v5(1306.31,698.25) ; v3(1353.17,144.78) 1353.17,168.57 1362.31,177.71 1362.31,196.25 1373.31,207.25 1392.36,207.25 C1010.1@1392.65,206.97
  BOTTOM w12: v1(803.15,992.13) 802.38,992.89 802.38,1018.92 9C11.1@803.15,1019.68 ; 9C15.1@803.15,1090.55 802.38,1091.32 802.38,1117.34 v1(803.15,1118.11) ; v1(803.15,1149.61) 9C9.1@832.14,1149.61 ; 9C7.1@862.2,960.63 866.14,956.69 v1(866.14,909.45) ; v1(874.02,1803.15) 937.01,1803.15 938.44,1804.58 10C24.1@938.44,1807.09 ; 9C13.1@926.63,1145.67 928.37,1143.93 928.37,1118.88 v1(929.13,1118.11) ; v1(929.13,960.63) 938.98,950.79 938.98,933.61 9C8.1@939.51,933.07 ; v1(929.13,1055.12) v1(960.63,1055.12) 959.86,1054.35 959.86,1028.32 9C10.1@960.63,1027.56 ; 10C23.1@940.94,1683.61 941.66,1684.32 971.72,1684.32 v1(972.44,1685.04) ; v1(940.94,1716.54) 10C41.1@972.44,1716.54 ; v1(940.94,2031.5) 10C34.1@973.87,2031.5 ; C1007.1@947.45,169.29 C1006.2@1003.94,169.29 ; 10C25.1@969.94,1877.95 971.68,1879.69 971.68,1904.75 v1(972.44,1905.51) 10C42.1@972.44,1937.01 ; v1(972.44,1622.05) v1(972.44,1685.04) ; 10C41.1@973.87,1716.54 10C41.1@972.44,1716.54 ; 10C40.1@976.38,1748.03 972.44,1744.09 10C41.1@972.44,1716.54 ; 9C14.1@992.13,933.07 991.36,933.84 991.36,959.86 v1(992.13,960.63) ; v1(1003.94,1622.05) 1004.7,1622.81 1004.7,1647.87 10C26.1@1007.87,1651.04 ; v1@1003.94,1972.44 1003.94,1993.56 10C22.1@1006.44,1996.06 ; 10C13.1@1007.87,1593.06 1009.61,1591.32 1034.67,1591.32 v1(1035.43,1590.55) ; 10C27.1@1025.06,1783.46 1027.56,1785.97 1027.56,1802.07 1035.43,1809.94 v1(1035.43,1811.02) ; v1(1035.43,1622.05) 1035.43,1623.13 1047.24,1634.94 1047.24,1652.29 10C48.1@1045.99,1653.54 ; v1(1035.43,1874.02) 1036.2,1873.25 1061.25,1873.25 10C59.1@1064.43,1870.08 ; v1(1066.93,1685.04) v1@1066.93,1686.12 ; v1(1066.93,1716.54) 1067.65,1717.25 1067.65,1743.38 10C58.1@1068.36,1744.09 ; 10C36.1@1070.87,2002.5 1072.6,2000.77 1097.66,2000.77 v1(1098.43,2000) ; 10C17.1@1102.36,1560.49 1103.8,1559.06 v1(1129.92,1559.06) ; 10C67.1@1125.98,1654.98 1129.16,1651.8 1129.16,1622.81 v1(1129.92,1622.05) ; 10C66.1@1133.86,1779.53 v1(1161.42,1779.53) ; v1(1161.42,1622.05) 10C64.1@1161.42,1654.98 ; 10C43.1@1185.04,1909.45 1186.47,1908.02 10C57.1@1224.41,1908.02 10C63.1@1259.84,1908.02 ; 10C43.1@1187.54,1905.51 1188.98,1904.08 1188.98,1879.04 1192.91,1875.1 v1(1192.91,1874.02) ; 10C32.1@1192.91,1974.94 1194.35,1976.38 1215.45,1976.38 1223.33,1968.5 v1(1224.41,1968.5) ; 10C14.1@1196.85,1586.61 1200.02,1589.79 1223.64,1589.79 v1(1224.41,1590.55) ; 10C65.1@1196.85,1714.03 1198.59,1715.77 1223.64,1715.77 v1(1224.41,1716.54) ; 10C60.1@1222.98,1811.02 1223.69,1810.31 1223.69,1780.24 v1(1224.41,1779.53) ; 10C31.1@1226.91,2027.56 1255.91,2027.56 ; v1(1255.91,1559.06) 1256.67,1558.29 1256.67,1533.23 10C16.1@1258.41,1531.5 ; 10C52.1@1255.91,1652.11 1256.62,1652.83 1286.68,1652.83 v1(1287.4,1653.54) v1@1286.64,1654.31 ; v1(1255.91,1779.53) 1256.67,1778.76 1281.73,1778.76 10C45.1@1284.9,1775.59 10C45.1@1281.73,1772.42 ; v1(1255.91,1937.01) 1256.67,1936.24 1256.67,1911.19 10C63.1@1259.84,1908.02 ; v1(1255.91,1968.5) v1(1255.91,2000) ; v1@1255.91,2003.94 1255.91,2027.56 ; 10C35.1@1279.53,2027.56 1255.91,2027.56 ; v1(1287.4,1527.56) 1287.4,1511.81 1299.21,1500 1316.39,1500 10C15.1@1318.9,1497.5 ; v1(1287.4,1622.05) 1288.17,1622.81 1313.22,1622.81 10C18.1@1314.96,1624.55 ; v1(1287.4,1685.04) v1(1318.9,1685.04) ; v1(1287.4,1905.51) 1286.64,1906.28 1261.58,1906.28 10C63.1@1259.84,1908.02 ; v1(1287.4,1937.01) 10C33.1@1314.96,1937.01 ; 10C61.1@1317.46,1716.54 1318.18,1715.82 1318.18,1685.76 v1(1318.9,1685.04) ; 10C56.1@1317.46,1811.02 1318.18,1811.74 1318.18,1841.8 v1(1318.9,1842.52) ; 10C5.1@1347.89,1681.1 1344.72,1684.27 1319.66,1684.27 v1(1318.9,1685.04) ; v1(1350.39,1590.55) 1351.16,1589.79 1374.78,1589.79 10C51.1@1377.95,1586.61 ; 10C49.1@1350.39,1880.46 v1(1350.39,1905.51) ; 10C44.1@1350.39,1996.06 1354.33,2000 v1(1381.89,2000) ; v1(1381.89,1748.03) 1382.66,1747.27 1382.66,1722.21 10C7.1@1384.39,1720.47 ; v1(1381.89,1779.53) 1382.66,1778.76 1407.71,1778.76 10C4.1@1410.88,1775.59 ; 10C50.1@1383.32,2062.99 1383.32,2056.55 1381.89,2055.12 v1(1381.89,2000) ; 10C6.1@1409.45,1840.02 1412.62,1836.84 1412.62,1811.79 v1(1413.39,1811.02) ; v1(1413.39,1685.04) 1413.39,1683.96 1431.1,1666.24 1431.1,1665.89 10C9.1@1440.94,1656.05 ; 10C8.1@1413.39,1968.5 v1(1413.39,2000) v1(1381.89,2000) ; v1(1476.38,1496.06) 10C47.1@1476.38,1555.12 ; v1(972.44,1685.04) 10C41.1@972.44,1716.54
  BOTTOM w15: v3(933.24,436.04) 965.1,404.19 R1129.1@965.1,383.82 R1128.2@965.1,332.64
  BOTTOM w20: v2@1004.78,118.78 C1006.2@1004.78,187.8 ; v3(1196.47,144.48) 1196.47,154.22 1219.17,176.91 C1011.2@1219.17,186.78 ; C1011.2@1231.17,179.78 1239.31,171.64 1272.54,171.64 C1014.2@1274.54,169.64
  BOTTOM w32: v2(1093.17,706.78) 1093.31,706.78 1147.18,652.92 1147.18,618.78
  BOTTOM w35: v2(118.11,807.09) P1.33@196.85,807.09 ; v2(299.21,1830.71) 299.21,1771.65 318.68,1752.19 401.36,1752.19 P1.10@401.57,1751.97 ; v2(299.21,1909.45) P1.6@401.57,1909.45 ; v2(322.83,1594.49) P1.14@401.57,1594.49 ; P1.24@401.57,1200.79 v2(480.31,1200.79) ; P1.2@401.57,2066.93 v2(480.31,2066.93) ; C1018.1@734.58,317.8 C1017.1@734.58,402.8 734.58,405.2 C1017.1@735.17,405.78 ; C1012.2@1147.18,562.8 1147.18,618.78 ; v2@1627.99,159.96 C1023.1@1627.99,290.36 C1024.1@1627.99,375.36 ; C1027.1@1708.21,577.05 1707.99,577.27 C1026.1@1707.99,655.36 1708.21,655.58 1708.21,722.82 v2(1708.83,723.44) ; v2(1889.76,1358.27) P2.19@1968.5,1358.27 ; v2(1889.76,1437.01) P2.17@1968.5,1437.01 ; P2.20@2173.23,1358.27 v2(2251.97,1358.27) ; P2.18@2173.23,1437.01 v2(2251.97,1437.01)
  other v1: 1078.74,1354.33
  other v2: 1005.17,119.78 1628.17,159.78 734.17,360.78 1234.38,367.29 1284.38,367.29 1334.38,367.29 1234.38,417.29 1284.38,417.29 1334.38,417.29 1234.38,467.29 1284.38,467.29 1334.38,467.29 630.09,715.57 712.77,715.57 791.51,715.57 1117.14,763.61 1409.62,778.56 1598.43,1200.79 1645.67,1200.79 893.7,1259.84 944.88,1259.84 1043.31,1271.65 1066.93,1318.9 783.46,2039.37 834.65,2039.37 826.77,2263.78 874.02,2263.78 921.26,2263.78 1413.39,2354.33 1464.57,2354.33 1464.57,2401.57
  other v5: 1503.94,2346.46 1429.13,2385.83
LED_FXS_01: P1.40 U11.N18 | length 1322.2
  TOP w6: v4(480.31,570.87) 548.53,639.08 548.53,717.82 677.17,846.46 677.17,1094.49 881.89,1299.21 972.44,1299.21 1082.68,1409.45 U11.N18@1082.68,1511.81
  BOTTOM w10: P1.40@401.57,570.87 v4(480.31,570.87)
LED_FXS_02: P1.38 U11.N16 | length 1308.8
  TOP w6: v4(480.31,649.61) 523.62,692.91 523.62,732.28 657.48,866.14 657.48,1102.36 874.02,1318.9 968.5,1318.9 1066.93,1417.32 1066.93,1559.06 U11.N16@1082.68,1574.8
  BOTTOM w10: P1.38@401.57,649.61 v4(480.31,649.61)
LED_FXS_03: P1.36 U11.P18 | length 1156.3
  TOP w6: v4(480.31,728.35) 637.8,885.83 637.8,1110.24 866.14,1338.58 964.57,1338.58 1051.18,1425.2 U11.P18@1051.18,1511.81
  BOTTOM w10: P1.36@401.57,728.35 v4(480.31,728.35)
LED_FXS_04: P1.34 U11.P17 | length 1111.4
  TOP w6: v4(480.31,807.09) 618.11,944.88 618.11,1118.11 858.27,1358.27 960.63,1358.27 1035.43,1433.07 1035.43,1527.56 U11.P17@1051.18,1543.31
  BOTTOM w10: P1.34@401.57,807.09 v4(480.31,807.09)
LED_FXS_05: P1.32 U11.T17 | length 998.8
  TOP w6: v4(480.31,885.83) 598.43,1003.94 598.43,1125.98 850.39,1377.95 917.32,1377.95 1003.94,1464.57 1003.94,1527.56 U11.T17@988.19,1543.31
  BOTTOM w10: P1.32@401.57,885.83 v4(480.31,885.83)
LED_FXS_06: P1.30 U11.T18 | length 903.2
  TOP w6: v4(480.31,964.57) 523.62,964.57 578.74,1019.68 578.74,1133.86 842.52,1397.64 913.39,1397.64 988.19,1472.44 U11.T18@988.19,1511.81
  BOTTOM w10: P1.30@401.57,964.57 v4(480.31,964.57)
LED_FXS_07: P1.39 U11.U17 | length 1492.3
  TOP w6: v4(118.11,570.87) 413.39,866.14 413.39,952.76 456.69,996.06 519.69,996.06 559.06,1035.43 559.06,1141.73 834.65,1417.32 909.45,1417.32 972.44,1480.32 972.44,1527.56 U11.U17@956.69,1543.31
  BOTTOM w10: v4(118.11,570.87) P1.39@196.85,570.87
LED_FXS_08: P1.37 U11.U18 | length 1375.9
  TOP w6: v4(118.11,649.61) 381.89,913.39 381.89,956.69 437.01,1011.81 507.87,1011.81 539.37,1043.31 539.37,1149.61 826.77,1437.01 905.51,1437.01 956.69,1488.19 U11.U18@956.69,1511.81
  BOTTOM w10: v4(118.11,649.61) P1.37@196.85,649.61
LED_LINK1_WAN1_IN: P1.16 U11.U13 | length 631.8
  TOP w6: v4(480.31,1515.75) 500,1535.43 685.04,1535.43 834.65,1685.04 940.94,1685.04 U11.U13@956.69,1669.29
  BOTTOM w10: P1.16@401.57,1515.75 v4(480.31,1515.75)
LED_LINK1_WAN2_IN: P1.20 U11.T14 | length 715.4
  TOP w6: v4(480.31,1358.27) 562.99,1358.27 858.27,1653.54 972.44,1653.54 U11.T14@988.19,1637.8
  BOTTOM w10: P1.20@401.57,1358.27 v4(480.31,1358.27)
LED_LINK2_WAN1_IN: P1.18 U11.V13 | length 619.8
  TOP w6: v4(480.31,1437.01) 559.05,1515.75 688.98,1515.75 842.52,1669.29 U11.V13@925.2,1669.29
  BOTTOM w10: P1.18@401.57,1437.01 v4(480.31,1437.01)
LED_LINK2_WAN2_IN: P1.22 U11.V14 | length 672
  TOP w6: v4(480.31,1279.53) 535.43,1334.65 562.99,1334.65 866.14,1637.8 U11.V14@925.2,1637.8
  BOTTOM w10: P1.22@401.57,1279.53 v4(480.31,1279.53)
LED_LINK_WAN1_OUT: P1.26 U11.V15 | length 786.5
  TOP w6: v4(480.31,1122.05) 480.31,1145.67 539.37,1204.72 539.37,1287.4 655.51,1403.54 858.27,1606.3 U11.V15@925.2,1606.3
  BOTTOM w10: P1.26@401.57,1122.05 v4(480.31,1122.05)
LED_LINK_WAN2_OUT: P1.28 U11.U15 | length 882.9
  TOP w6: v4(480.31,1043.31) 519.69,1082.68 519.69,1157.48 559.06,1196.85 559.06,1283.46 666.51,1390.92 866.14,1590.55 940.94,1590.55 U11.U15@956.69,1606.3
  BOTTOM w10: P1.28@401.57,1043.31 v4(480.31,1043.31)
Net9R18_2: 9R18.2 9U2.1 | length 100.1
  TOP w10: 9R18.2@1637.8,842.52 1641.73,846.46 9U2.1@1641.73,940.94
Net9R19_2: 9R19.2 9U6.1 | length 199.4
  TOP w10: 9R19.2@1283.46,775.59 1311.02,775.59 1326.77,791.34 9U6.1@1326.77,940.94
Net10U7_1: 10U7.1 C1022.1 | length 78.7
  TOP w12: 10U7.1@1419.22,309.02 C1022.1@1497.96,309.02
Net10U7_4: 10U7.4 10U7.5 C1022.2 L222.1
Net10U7_8: 10U7.8 10U7.9 C1025.2 L224.1
Net10U7_12: 10U7.12 C1025.1 | length 78.7
  TOP w12: 10U7.12@1419.22,525.55 C1025.1@1497.96,525.55
Net10U7_13: 10U7.13 R1123.2 | length 95.7
  TOP w5: 10U7.13@1392.65,552.13 1392.65,575.75 1424.15,607.25 R1123.2@1424.15,634.8
Net10U7_14: 10U7.14 R1125.2 | length 87.6
  TOP w5: 10U7.14@1372.96,552.13 1372.96,575.75 1384.78,587.56 R1125.2@1384.78,634.8
Net10U7_15: 10U7.15 R1124.2 | length 85.9
  TOP w5: R1124.2@1345.41,634.8 1345.41,607.25 1353.28,599.37 10U7.15@1353.28,552.13